# Altium PCB Acoustic_Transmitter.PcbDoc
Units mil, origin at the board's own origin, x right, y up, seen from the top; angles counter-clockwise.
Board outline 3000 x 3000 mil, 2 copper layers (Top Layer, Bottom Layer); 45 components, 32 nets, 206 pads, 12 vias.
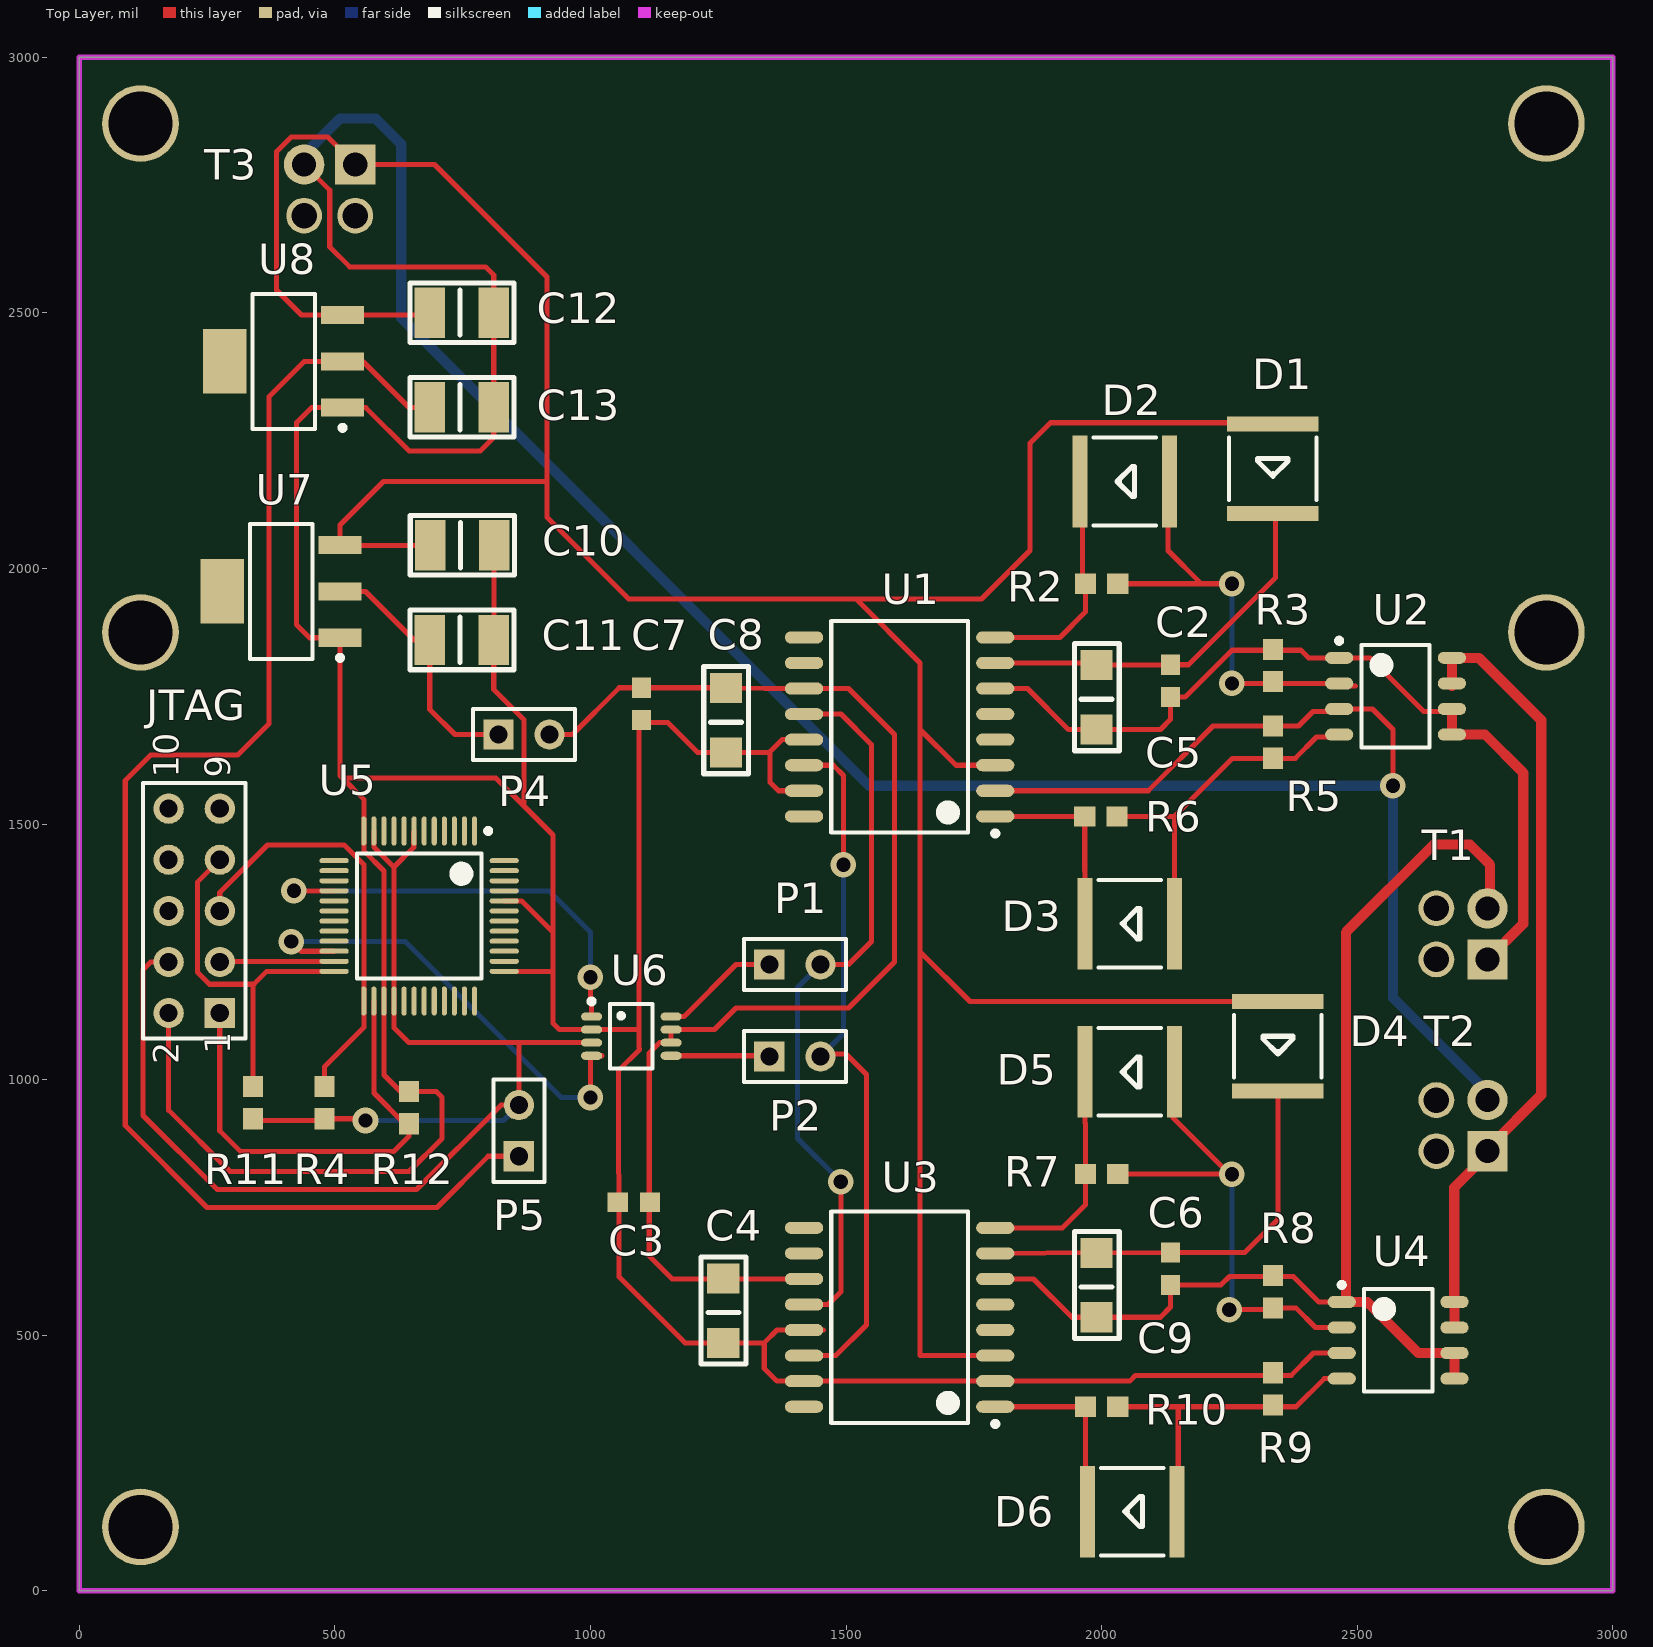
[diagram p0: Top Layer view]
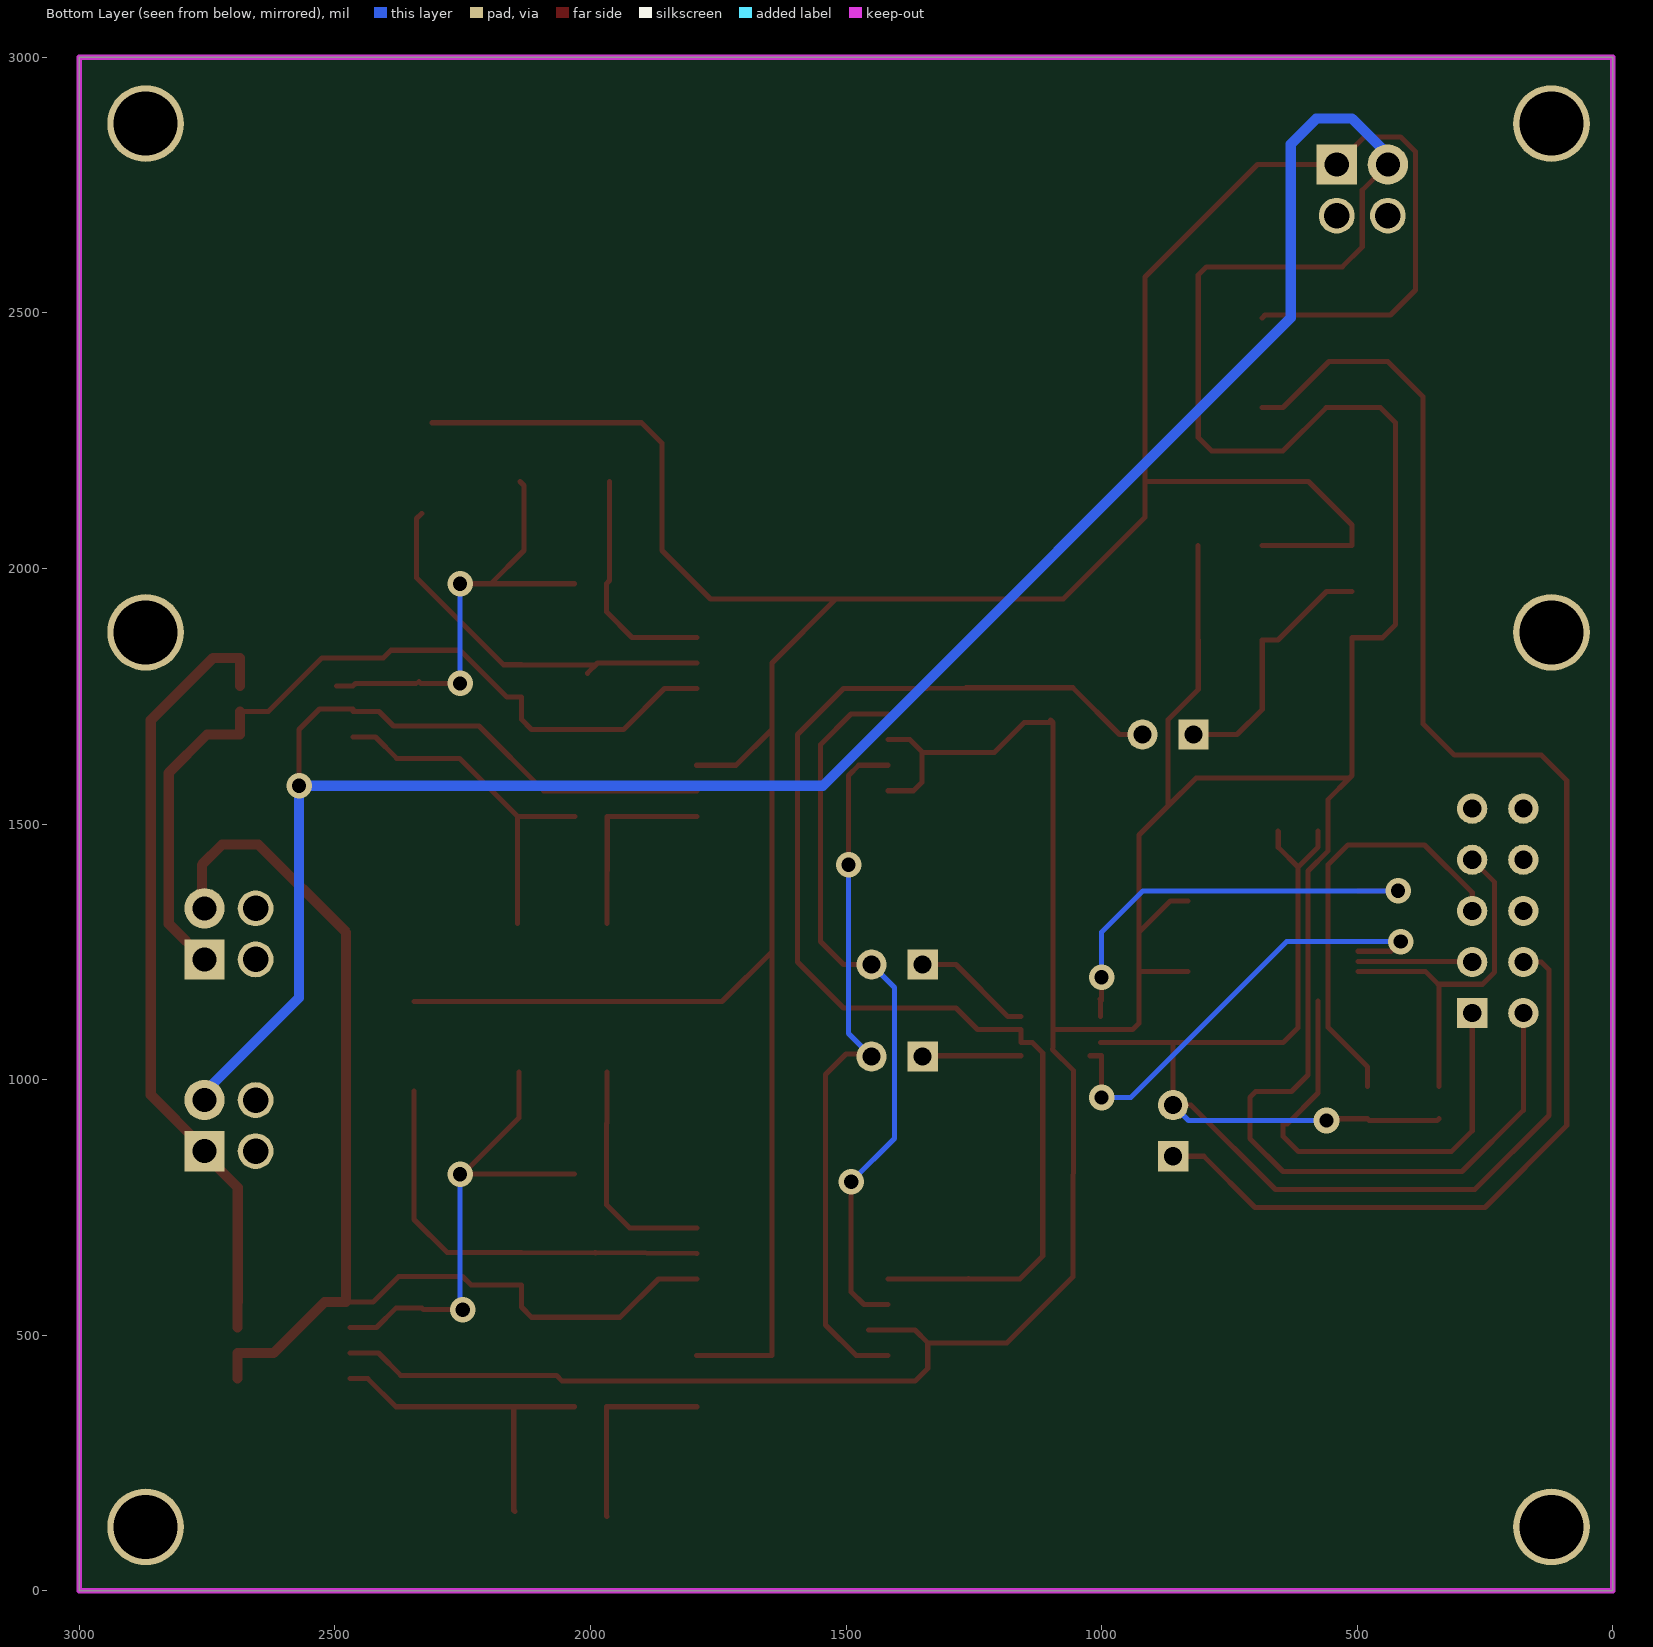
[diagram p1: Bottom Layer view, seen from below]

## Layer stack, top to bottom
Top Solder: solder mask 0.4, Solder Resist, Dk 3.5
Top Layer: signal copper 1.4
Dielectric 1: dielectric 12.6, FR-4, Dk 4.8
Bottom Layer: signal copper 1.4
Bottom Solder: solder mask 0.4, Solder Resist, Dk 3.5

## Board outline
0,0 0,3000 3000,3000 3000,0

## Design rules (kind name [scope] priority, off if disabled: settings)
Clearance Clearance_1 [All] p1: gap=9
Clearance [All] p2: gap=9
PolygonConnect [All] p1: connectstyle=Relief reliefconductorwidth=10 reliefentries=4 polygonreliefangle="90 Angle" airgapwidth=10
RoutingVias [All] p1: holewidth=28 width=50 viastyle="Through Hole" minholewidth=28 minwidth=28 maxholewidth=50 maxwidth=100
SolderMaskExpansion [All] p1: expansion=4
Width [All] p1: maxlimit=30 minlimit=10 preferedwidth=10
30 further rules are at their usual default settings.

## Classes and differential pairs
component class U_H_Bridge: C2 C3 C4 C5 C6 C7 C8 C9 D1 D2 D3 D4 D5 D6 R2 R3 R5 R6 R7 R8 R9 R10 T1 T2 U1 U2 U3 U4
component class U_Micro_Controller: JTAG P1 P2 R4 R11 R12 U5 U6
component class U_Power: C10 C11 C12 C13 P4 P5 T3 U7 U8

## Components (designator, comment, footprint, x,y, rotation, side; value= is the part's Value field where it differs from the comment)
C2 "Cap" CAPC0603 2135,1780 r90 top
C3 "Cap" CAPC0603 1085,760 r0 top
C4 "Cap1206" CAP1206 1260,485 r270 top
C5 "Cap1206" CAP1206 1990,1685 r270 top
C6 "Cap" CAPC0603 2135,630 r90 top
C7 "Cap" CAPC0603 1100,1735 r90 top
C8 "Cap1206" CAP1206 1265,1640 r270 top
C9 "Cap1206" CAP1206 1990,535 r270 top
C10 "CAP1210" CAP1210 685.79,2045 r180 top
C11 "CAP1210" CAP1210 685,1860 r180 top
C12 "CAP1210" CAP1210 685,2500 r180 top
C13 "CAP1210" CAP1210 685,2315 r180 top
D1 "Diode" TEMD5510FX01 2335,2195 r270 top
D2 "Diode" TEMD5510FX01 2045,2170 r180 top
D3 "Diode" TEMD5510FX01 2055,1305 r180 top
D4 "Diode" TEMD5510FX01 2345,1065 r270 top
D5 "Diode" TEMD5510FX01 2055,1015 r180 top
D6 "Diode" TEMD5510FX01 2060,155 r180 top
JTAG "Header 5X2" HDR2X5 275,1130 r90 top
P1 "Header 2" HDR1X2 1350,1225 r0 top
P2 "Header 2" HDR1X2 1350,1045 r0 top
P4 "Header 2" HDR1X2 820,1675 r0 top
P5 "Header 2" HDR1X2 860,850 r90 top
R2 "Res" RES0603 2000,1970 r0 top
R3 "Res" RES0603 2335,1810 r90 top
R4 "Res" RES0603 480,955 r270 top
R5 "Res" RES0603 2335,1660 r270 top
R6 "Res" RES0603 1998.5,1515 r0 top
R7 "Res" RES0603 2000,815 r0 top
R8 "Res" RES0603 2335,585 r90 top
R9 "Res" RES0603 2335,395 r270 top
R10 "Res" RES0603 2000,360 r0 top
R11 "Res" RES0603 340,955 r270 top
R12 "Res" RES0603 645,945 r270 top
T1 "1725656" 1725656 2755,1235 r180 top
T2 "1725656" 1725656 2755,860 r180 top
T3 "1725656" 1725656 540,2790 r270 top
U1 "IR2110" IR2110 1605,1690 r180 top
U2 "FQS4901" FQS4901 2575,1750 r0 top
U3 "IR2110" IR2110 1605,535 r180 top
U4 "FQS4901" FQS4901 2580,490 r0 top
U5 "MSP430F5308IPT" MSP430F5308IPT 665,1320 r270 top
U6 "TXS012" TXS012 1080,1085 r0 top
U7 "LM1117MPX-5.0" LM1117MPX 395,1955 r180 top
U8 "LM1117MPX-3.3" LM1117MPX 400,2405 r180 top

## Footprints (in the part's own frame and the unit in brackets; to place one, negate y for a bottom-side part, rotate by r counter-clockwise, add the part's x,y. Pads: shape width x height; smd on the part's side, far side on the other; paste and mask are expansions set on the pad)
1725656 [mm]
  round 1.778 hole 1.27: 0(2.54,0) 0(2.54,-2.54)
  rect 2x2 hole 1.2: 1(0,0)
  round 2 hole 1.2: 2(0,-2.54)
CAP1206 [mm]
  rect 1.5x1.6 smd: 1(0,0) 2(-3.2,0)
  silkscreen extent -4.27,-1.1 1.06,1.13, body extent -3.2,-0.9 0.02,0.9, height 1.6
CAP1210 [mm]
  rect 1.5x2.5 smd: 1(-0.02,0) 2(-3.2,0)
  silkscreen extent -4.2,-1.48 0.97,1.48, body extent -3.22,-1.25 0,1.26, height 2.5
CAPC0603 [mm] "Chip Capacitor, 2-Leads, Body 1.60x0.80mm, IPC Medium Density"
  rect 1x0.95 smd: 1(-0.8,0) 2(0.8,0)
  body extent -0.88,-0.48 0.87,0.48, height 0.8
FQS4901 [mm] "SOP, 8-Leads, Body 4.92x3.95mm, Pitch 1.27mm, IPC Medium Density"
  oval 1.4x0.6 smd: 1(-2.8,1.905) 2(-2.8,0.635) 3(-2.8,-0.635) 4(-2.8,-1.905) 5(2.8,-1.905) 6(2.8,-0.635) 7(2.8,0.635) 8(2.8,1.905)
  silkscreen extent -2.92,-2.55 1.7,2.88, body extent -2.1,-2.55 2.1,2.55, height 1.8
HDR1X2 [mm] "Connector; Header; 2 Position"
  rect 1.5x1.5 hole 0.9: 1(0,0)
  round 1.5 hole 0.9: 2(2.54,0)
  silkscreen extent -1.27,-1.27 3.81,1.27
HDR2X5 [mm] "Connector; Header; 5x2 Position"
  rect 1.5x1.5 hole 0.9: 1(0,0)
  round 1.5 hole 0.9: 2(0,2.54) 3(2.54,0) 4(2.54,2.54) 5(5.08,0) 6(5.08,2.54) 7(7.62,0) 8(7.62,2.54) 9(10.16,0) 10(10.16,2.54)
  silkscreen extent -1.27,-1.27 11.43,3.81
IR2110 [mm] "SOIC, 16-Leads, Body 10.30x7.50mm, Pitch 1.27mm, IPC Medium Density"
  oval 1.9x0.6 smd: 1(-4.75,4.445) 2(-4.75,3.175) 3(-4.75,1.905) 4(-4.75,0.635) 5(-4.75,-0.635) 6(-4.75,-1.905) 7(-4.75,-3.175) 8(-4.75,-4.445) 9(4.75,-4.445) 10(4.75,-3.175) 11(4.75,-1.905) 12(4.75,-0.635) 13(4.75,0.635) 14(4.75,1.905) 15(4.75,3.175) 16(4.75,4.445)
  silkscreen extent -4.88,-5.25 3.4,5.42, body extent -3.8,-5.25 3.8,5.25, height 2.65
LM1117MPX [mm] "SOT223, 4-Leads, Body 6.50x7.00mm (avg), Pitch 2.30mm, IPC Medium Density"
  rect 2.15x0.9 smd: 1(-2.925,2.3) 2(-2.925,0) 3(-2.925,-2.3)
  rect 2.15x3.2 smd: 4(2.925,0)
  silkscreen extent -3.05,-3.35 1.55,3.42, body extent -1.85,-3.35 1.85,3.35, height 1.8
MSP430F5308IPT [mm] "TSQFP, 48-Leads, Body 7.00x7.00mm, Pitch 0.50mm, IPC Medium Density"
  oval 1.45x0.25 smd: 1(-4.225,2.75) 2(-4.225,2.25) 3(-4.225,1.75) 4(-4.225,1.25) 5(-4.225,0.75) 6(-4.225,0.25) 7(-4.225,-0.25) 8(-4.225,-0.75) 9(-4.225,-1.25) 10(-4.225,-1.75) 11(-4.225,-2.25) 12(-4.225,-2.75) 25(4.225,-2.75) 26(4.225,-2.25) 27(4.225,-1.75) 28(4.225,-1.25) 29(4.225,-0.75) 30(4.225,-0.25) 31(4.225,0.25) 32(4.225,0.75) 33(4.225,1.25) 34(4.225,1.75) 35(4.225,2.25) 36(4.225,2.75)
  oval 0.25x1.45 smd: 13(-2.75,-4.225) 14(-2.25,-4.225) 15(-1.75,-4.225) 16(-1.25,-4.225) 17(-0.75,-4.225) 18(-0.25,-4.225) 19(0.25,-4.225) 20(0.75,-4.225) 21(1.25,-4.225) 22(1.75,-4.225) 23(2.25,-4.225) 24(2.75,-4.225) 37(2.75,4.225) 38(2.25,4.225) 39(1.75,4.225) 40(1.25,4.225) 41(0.75,4.225) 42(0.25,4.225) 43(-0.25,4.225) 44(-0.75,4.225) 45(-1.25,4.225) 46(-1.75,4.225) 47(-2.25,4.225) 48(-2.75,4.225)
  silkscreen extent -4.35,-3.1 3.1,3.55, body extent -3.5,-3.5 3.5,3.5, height 1.6
RES0603 [mm] "Chip Resistor, 2-Leads, Body 1.60x0.80mm, IPC Medium Density"
  rect 1.05x1 smd: 1(-0.8,0) 2(0.8,0)
  body extent -0.88,-0.48 0.87,0.47, height 0.8
TEMD5510FX01 [mm] "PHOTODIODE PIN HI SPEED MINI SMD"
  rect 0.75x4.55 smd: A(-2.225,0) C(2.225,0)
  silkscreen extent -1.55,-2.18 1.55,2.17, body extent -2.57,-2.2 2.58,2.19, height 1.12
TXS012 [mm] "TSOP, 8-Leads, Body 2.95x2.80mm, Pitch 0.65mm, IPC Medium Density"
  oval 1.05x0.4 smd: 1(-1.975,0.975) 2(-1.975,0.325) 3(-1.975,-0.325) 4(-1.975,-0.975) 5(1.975,-0.975) 6(1.975,-0.325) 7(1.975,0.325) 8(1.975,0.975)
  silkscreen extent -2.1,-1.6 1.05,1.85, body extent -1.45,-1.6 1.45,1.6, height 1.3

## Part data
C4 C5 C8 C9: "CAP CER 1UF 50V 10% X7R 1206"
C10 C11 C12 C13: "CAP CER 10UF 50V 20% X5R 1210"
D1 D2 D3 D4 D5 D6: "Standard Diode Template"
JTAG: "Header, 5-Pin, Dual row"
P1 P2 P4 P5: "Header, 2-Pin"
T1 T2 T3: "CONN TERM BLOCK 2.54MM 2POS"
U1 U3: "IC DRIVER HIGH/LOW SIDE 16SOIC"
U2 U4: "MOSFET 2N-CH 400V 0.45A 8SOP"
U5: "IC MCU 16BIT 16KB FLASH 48LQFP"
U6: library part TXS0102, "IC VOLT-LEVEL TRANSLATOR US8"
U7: library part LM1117MPX-5, "IC REG LDO 5V 0.8A SOT223"
U8: "IC REG LDO 3.3V 0.8A SOT223"

## Free pads (board coordinates)
  round 150 hole 125: 0(120,125) 0(120,1875) 0(120,2870) 0(2870,125) 0(2870,1875) 0(2870,2870)

## Via types
v1: diameter 50, hole 28, Top Layer to Bottom Layer, 12 vias

## Nets (pads, with @x,y where several pads share a name; then routed paths per layer and width w, separated by ;. In a path a pad name is that pad's centre, name@x,y a point inside that pad or via, vN(x,y) a via of type N, cw(c..) or ccw(c..) an arc to the next point about the centre after c; other vN are vias at no path point)
3.3V: JTAG.4 P5.2 R4.2 R11.2 U5.7 U5.11 U5.28 U6.3 | length 2749.8
  Top Layer w10: JTAG.4 140,1230 125,1215 125,930 270,785 660,785 825,950 P5.2 860,1072.2 ; R11.2 343.5,920 476.5,920 R4.2 556.5,923.5 v1(560,920) ; U5.11 576.42,1454.63 615.1,1415.95 ; U5.7 654.39,1485.57 654.39,1454.39 615.79,1415.79 U5.28 615.79,1101.42 645,1072.2 860,1072.2 ; U6.3 860,1072.2
  Bottom Layer w10: v1(560,920) 830,920 P5.2
5V: C3.2 C4.2 C7.2 C8.2 P4.2 U1.11 U3.11 U6.6 U6.7 | length 2562.2
  Top Layer w10: P4.2 965,1675 1056.5,1766.5 C7.2 1265,1766.5 C8.2 1341.98,1765 U1.11 1505,1765 1595,1675 1595,1230 1505,1140 1285,1140 1242.8,1097.8 U6.7 U6.6 1135,1072.2 1115,1052.2 1115,655 1160,610 1338.98,610 ; C4.2 1338.98,610 ; U3.11 1338.98,610
12V: C10.1 C12.1 D1.A D4.A T3.1 U1.3 U3.3 U7.3 U8.3 | length 6695.9
  Top Layer w10: C12.1@685.79,2490 680.24,2495.55 U8.3 435,2495.55 386,2544.55 386,2815 415,2844 486,2844 T3.1 695,2790 915,2570 915,2100 1075,1940 1765,1940 1860,2035 1860,2245 1900,2285 D1.A@2310,2285 ; C10.1 510.71,2045 U7.3 510.16,2085.16 595,2170 800,2170 915,2170 ; 1520,1940 1645,1815 1645,460 U3.3 ; 1645,1250 1742.4,1152.6 D4.A ; 1645,1685 1715,1615 U1.3
"32MHZ CLK": U5.45
300V: T2.1 U2.7 U2.8 U4.7 U4.8 | length 1557.1
  Top Layer w10: U4.8@2690,565 U4.8 ; T2.1@2729,828 2729,870 T2.1@2750,870
  Top Layer w20: U2.7@2685.24,1770 U2.8 2738,1825 2860,1703 2860,970 2760,870 T2.1@2750,870 ; U4.8@2690,565 2690,789 T2.1@2729,828 ; U4.7 U4.8
DOWN: P2.2 U1.14 U3.14 | length 1397.4
  Top Layer w10: U3.14 1480,460 1540,520 1540,1010 1500,1050 P2.2@1450,1050 ; U1.14 1475,1615 1495,1595 v1(1495,1420)
  Bottom Layer w10: P2.2 1495,1090 v1(1495,1420)
FORWARD: U5.16 U6.1 | length 863.2
  Top Layer w10: v1(420,1369.21) U5.16 ; v1(1000,1200) 1000,1155 1002.69,1157.69 ; U6.1 1002.24,1157.24
  Bottom Layer w10: v1(420,1369.21) 919.21,1369.21 1000,1288.42 v1(1000,1200)
GND: C3.1 C4.1 C7.1 C8.1 C10.2 C11.2 C12.2 C13.2 JTAG.2 R5.1 R9.1 R12.1 T2.2 T3.2 U1.2 U1.13 U1.15 U2.3 U3.2 U3.13 U3.15 U4.3 U5.12 U5.27 U5.37 U5.44 U6.2 U7.1 U8.1 | length 13297.2
  Top Layer w10: JTAG.2 175,940 295,820 645,820 710,885 710,965 698.5,976.5 R12.1 628.5,976.5 596.1,1008.9 U5.27 596.1,1408.08 556.73,1447.45 U5.12 556.73,1548.27 515,1590 ; T3.2 490,2740 490,2629 529,2590 795,2590 810.98,2574.02 C12.2 C13.2 810.98,2255.98 785,2230 645,2230 560.55,2314.45 U8.1 454.45,2314.45 425,2285 425,1890 450.55,1864.45 U7.1 510.16,1594.84 515,1590 ; C10.2 811.77,1860.79 C11.2 810.98,1762.87 870,1703.85 870,1535 ; U5.37 926.73,1211.73 ; U5.44 865.47,1349.53 925,1290 ; 1082,1044.61 1095.92,1058.52 ; C7.1 C7.1@1095,1698.5 ; U1.15 1368,1565 1351.67,1581.33 1351.67,1641.67 ; U1.13 1375,1665 1351.67,1641.67 ; 1456,510 U3.13 1365,510 1340,485 ; U1.2 2091.5,1565 2218,1691.5 R5.1 2385,1691.5 2413.5,1720 U2.3@2464.76,1720 ; U2.3 2530,1725 2570,1685 v1(2570,1575) ; U4.3 2414.5,465 2371,421.5 2066.5,421.5 2055,410 U3.2 U3.15 1365,410 1340,435 1340,485 ; 515,1590 815,1590 870,1535 ; 870,1535 926.73,1478.27 926.73,1211.73 ; 926.73,1211.73 926.73,1110.27 939.2,1097.8 U6.2 1092.2,1097.8 1095,1095 ; 1095,1095 1095,1064.24 1095.92,1058.52 ; 1095,1095 C7.1@1095,1698.5 ; C7.1@1095,1698.5 1151.5,1698.5 1210,1640 C8.1 1350,1640 1351.67,1641.67 ; 1095.92,1058.52 1054.64,1017.25 1056.29,613.71 1185,485 C4.1 1340,485
  Bottom Layer w20: T3.2@435,2795 435,2805 510,2880 580,2880 630,2830 630,2490 1545,1575 v1(2570,1575) 2570,1160 2750,980 T2.2@2750,965
"JTAG ENABLE": U5.47
"LOAD L": C2.1 C5.1 R3.2 T1.1 U1.6 U2.1 U2.5 U2.6 | length 1675.6
  Top Layer w10: U1.6 1855,1765 1935,1685 C5.1 2115,1685 2135,1705 C2.1 2163.5,1748.5 2255,1840 2390,1840 2405,1825 U2.1 2525,1825 2630,1720 U2.6@2685.24,1720
  Top Layer w20: U2.6@2685.24,1720 U2.5 2750,1675 2825,1600 2825,1305 T1.1
"LOAD R": C6.1 C9.1 R8.2 T1.2 U3.6 U4.1 U4.5 U4.6 | length 2272.9
  Top Layer w10: U3.6 1867,610 1942,535 C9.1 2115,535 2135,555 C6.1 2233.5,598.5 2250,615 2375,615 2425,565 U4.1 U4.1@2478,565
  Top Layer w20: U4.5 U4.6 2620,465 2520,565 2478,565 2478,1288 2650,1460 2720,1460 2760,1420 T1.2@2760,1340
NetC11_1: C11.1 P4.1 U7.2 | length 505.4
  Top Layer w10: U7.2 560,1955 655,1860 C11.1 685.79,1724.21 735,1675 P4.1
NetC13_1: C13.1 P5.1 U8.2 | length 2900.3
  Top Layer w10: C13.1 645,2315 555,2405 U8.2 440,2405 371,2336 371,1696 310,1635 140,1635 90,1585 90,910 250,750 700,750 800,850 P5.1
NetD2_A: D2.A R2.2 R3.1 U2.2 | length 937.6
  Top Layer w10: R2.2 v1(2255,1970) 2195,1970 2130,2035 2130,2162.4 D2.A@2137.6,2170 ; v1(2255,1775) 2331.5,1775 R3.1 ; R3.1@2341.5,1775 2459.76,1775 2464.76,1770 2497,1770
  Bottom Layer w10: v1@2255,1785 v1(2255,1970)
NetD2_C: D2.C R2.1 U1.8 | length 454.7
  Top Layer w10: U1.8 1918.5,1865 1968.5,1915 R2.1 1962.4,1976.1 D2.C@1962.4,2170
NetD3_A: D3.A R5.2 R6.2 U2.4 | length 709
  Top Layer w10: R6.2 2142.6,1515 ; D3.A 2142.6,1515 ; U2.4@2464.76,1670 2420.5,1670 2379,1628.5 R5.2 2256.1,1628.5 2142.6,1515
NetD3_C: D3.C R6.1 U1.1 | length 385.2
  Top Layer w10: U1.1 R6.1 1967.01,1409.39 1967.4,1409 D3.C
NetD5_A: D5.A R7.2 R8.1 U4.2 | length 983.3
  Top Layer w10: R7.2 v1(2255,815) ; D5.A@2140,1015 2140,925 2250,815 v1(2255,815) ; v1(2250,550) 2326.5,550 2330,553.5 2380,553.5 2418.5,515 U4.2 ; v1@2255,810 v1(2255,815)
  Bottom Layer w10: v1(2250,550) 2255,555 v1(2255,815)
NetD5_C: D5.C R7.1 U3.8 | length 455.6
  Top Layer w10: U3.8 1923.5,710 1968.5,755 R7.1 1968.5,914 1967.4,915.1 D5.C
NetD6_A: D6.A R9.2 R10.2 U4.4 | length 667
  Top Layer w10: R10.2 2150,360 ; D6.A 2150,157.4 2150,360 ; U4.4 2435.5,415 2380.5,360 2150,360
NetD6_C: D6.C R10.1 U3.1 | length 392
  Top Layer w10: U3.1 R10.1 1968.5,146.1 D6.C@1967.4,145
NetP1_1: P1.1 U6.8 | length 234.3
  Top Layer w10: U6.8 1183.39,1123.39 1285,1225 P1.1
NetP2_1: P2.1 U6.5 | length 197.1
  Top Layer w10: U6.5 1323.39,1046.61 1335,1035 P2.1@1350,1035
REVERSE: U5.22 U6.4 | length 905.2
  Top Layer w10: v1(415,1270) 433.9,1251.1 U5.22 ; v1(1000,965) U6.4@1000,1046.61 ; U6.4 1023,1046.61
  Bottom Layer w10: v1(415,1270) 638,1270 943,965 v1(1000,965)
RST_N: U5.48
TCLK: JTAG.1 R12.2 U5.26 | length 927.5
  Top Layer w10: JTAG.1 275,900 316,859 615,859 645,889 R12.2 636.5,913.5 576.42,973.58 U5.26
TDI: JTAG.7 R11.1 U5.24 | length 725.8
  Top Layer w10: JTAG.7 231,1386 231,1210.47 255,1186.47 341.47,1186.47 366.73,1211.73 U5.24 ; R11.1 340,1186.47
TDO: JTAG.3 U5.23 | length 224.1
  Top Layer w10: JTAG.3 295,1230 296,1231 U5.23@498.66,1231
TMS: JTAG.5 R4.1 U5.25 | length 837.9
  Top Layer w10: JTAG.5 275,1365.86 368.11,1458.97 518.34,1458.97 556.73,1420.58 U5.25 556.73,1101.73 480,1025 R4.1
UP: P1.2 U1.12 U3.12 | length 1436.7
  Top Layer w10: U3.12 1465,560 1490,585 v1(1490,800) ; U1.12 1490,1715 1550,1655 1550,1270 1505,1225 P1.2
  Bottom Layer w10: P1.2 1405,1180 1405,885 v1(1490,800)
"VB L": C2.2 C5.2 D1.C U1.7 | length 772.6
  Top Layer w10: U1.7 1985.98,1815 C5.2@2005.98,1795 ; C5.2 C2.2 2169.77,1811.5 2340,1981.72 2340,2097.4 D1.C@2330,2107.4
"VB R": C6.2 C9.2 D4.C U3.7 | length 832
  Top Layer w10: U3.7 1990,661.49 1990.51,661.5 C9.2 ; C9.2 C9.2 ; D4.C 2345,726.5 2280,661.5 C6.2 C9.2
pads on no net: JTAG.6 JTAG.8 JTAG.9 JTAG.10 T1.0 T2.0 T3.0 U1.4 U1.5 U1.9 U1.10 U1.16 U3.4 U3.5 U3.9 U3.10 U3.16 U5.1 U5.2 U5.3 U5.4 U5.5 U5.6 U5.8 U5.9 U5.10 U5.13 U5.14 U5.15 U5.17 U5.18 U5.19 U5.20 U5.21 U5.29 U5.30 U5.31 U5.32 U5.33 U5.34 U5.35 U5.36 U5.38 U5.39 U5.40 U5.41 U5.42 U5.43 U5.46 U7.4 U8.4

## Keep-outs
Keep-Out Layer:
  the board outline again, w10

## Text inside footprints (layer, text, board x,y; h text height)
JTAG: Top Overlay "2" at 195,1030 h50 r90; Top Overlay "1" at 295,1050 h50 r90; Top Overlay "9" at 295,1590 h50 r90; Top Overlay "10" at 195,1590 h50 r90